# Altium PCB PCB1.PcbDoc
Units mil, origin at the board's own origin, x right, y up, seen from the top; angles counter-clockwise.
Board outline 1075 x 500 mil, 4 copper layers (Top Layer, GND, VCC, Bottom Layer), stack 23.756 mil thick; 13 components, 8 nets, 41 pads, 7 vias.
Unrouted connection lines stored in the file: 3.
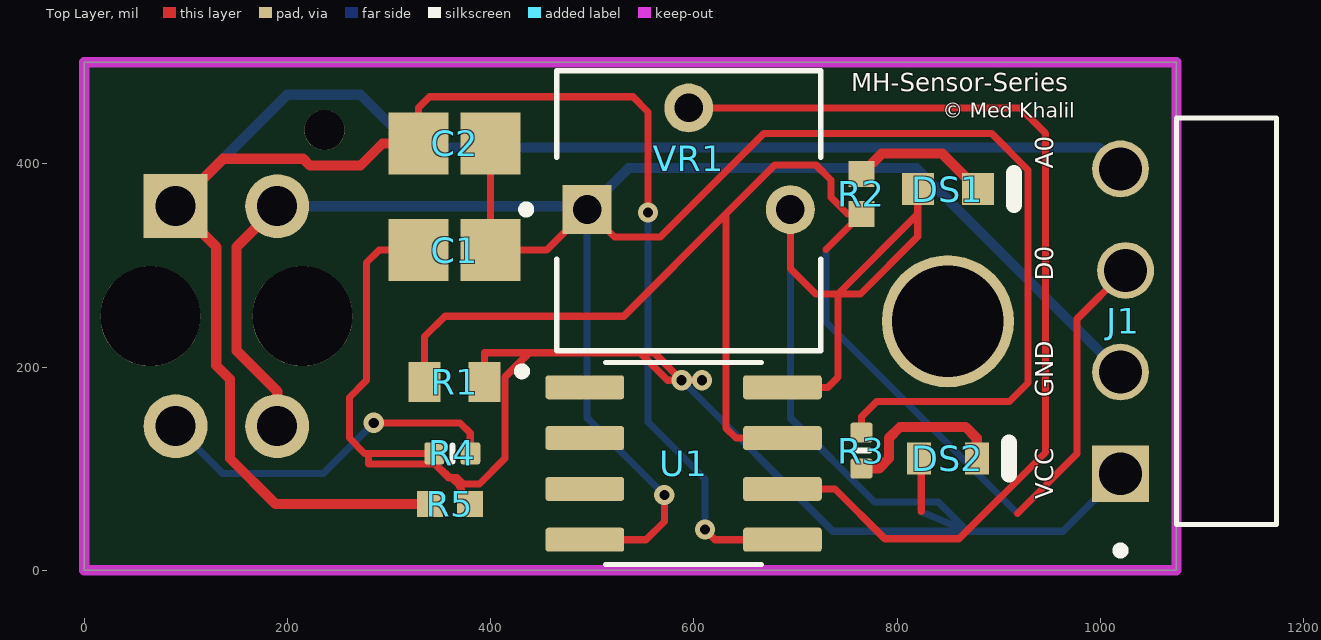
[diagram p0: Top Layer view]
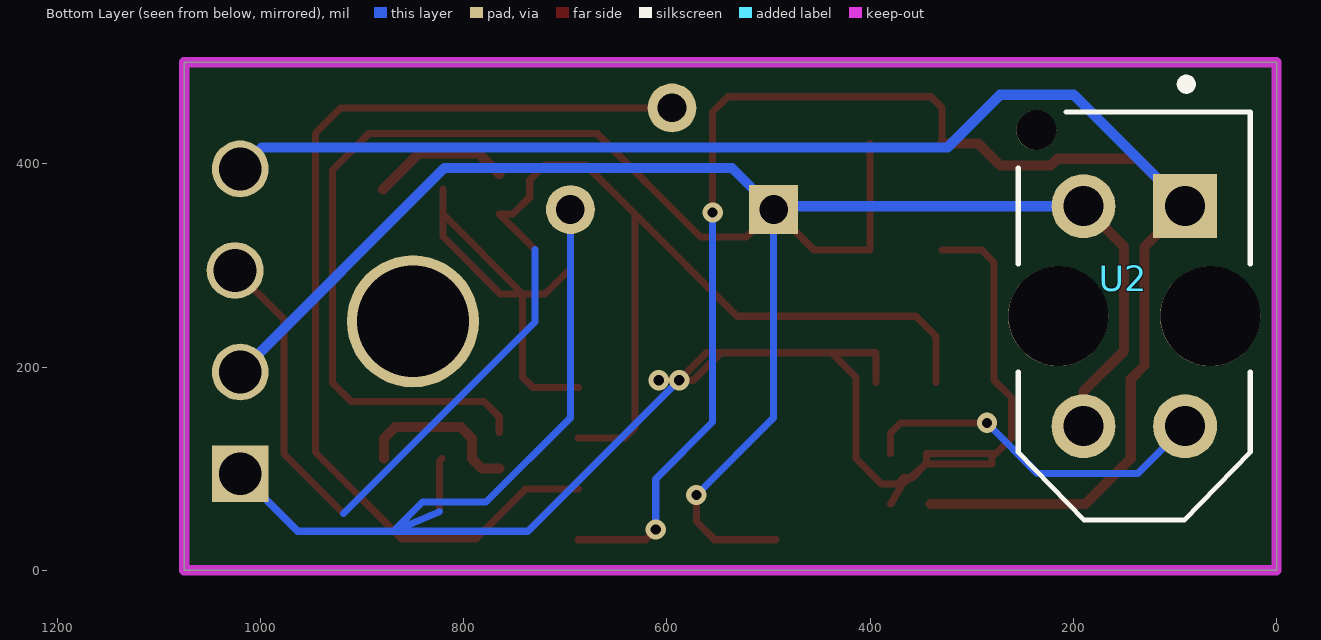
[diagram p1: Bottom Layer view, seen from below]
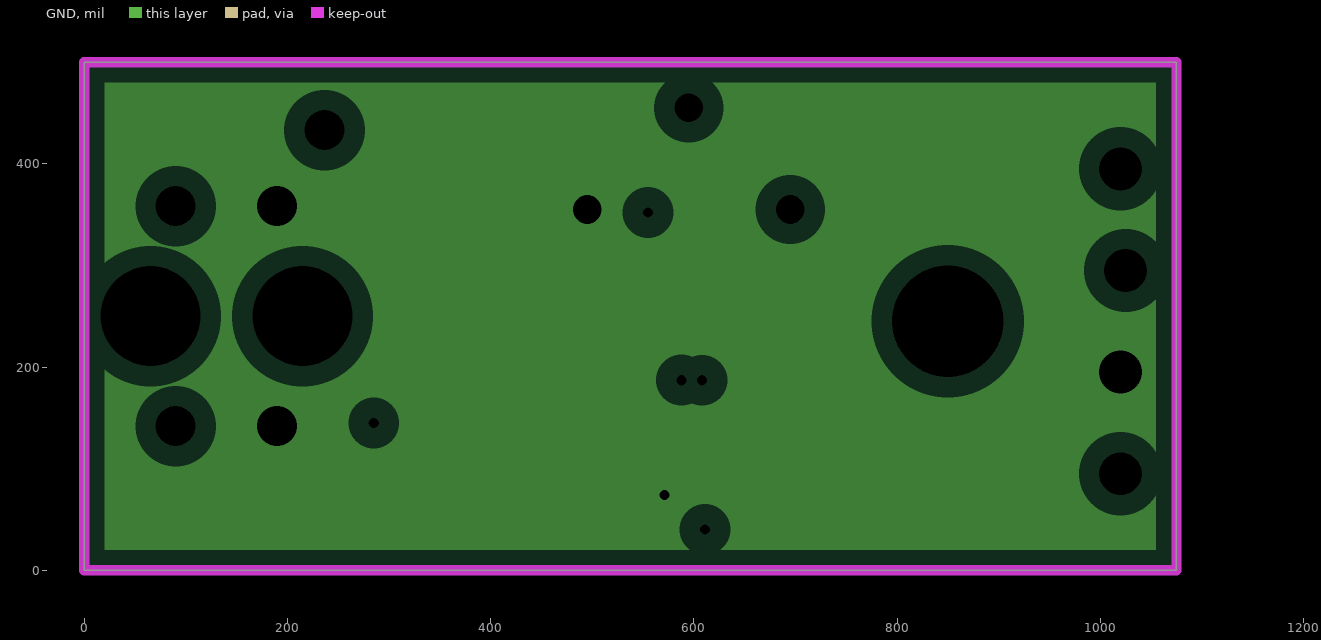
[diagram p2: GND, clearances drawn from the general rule]
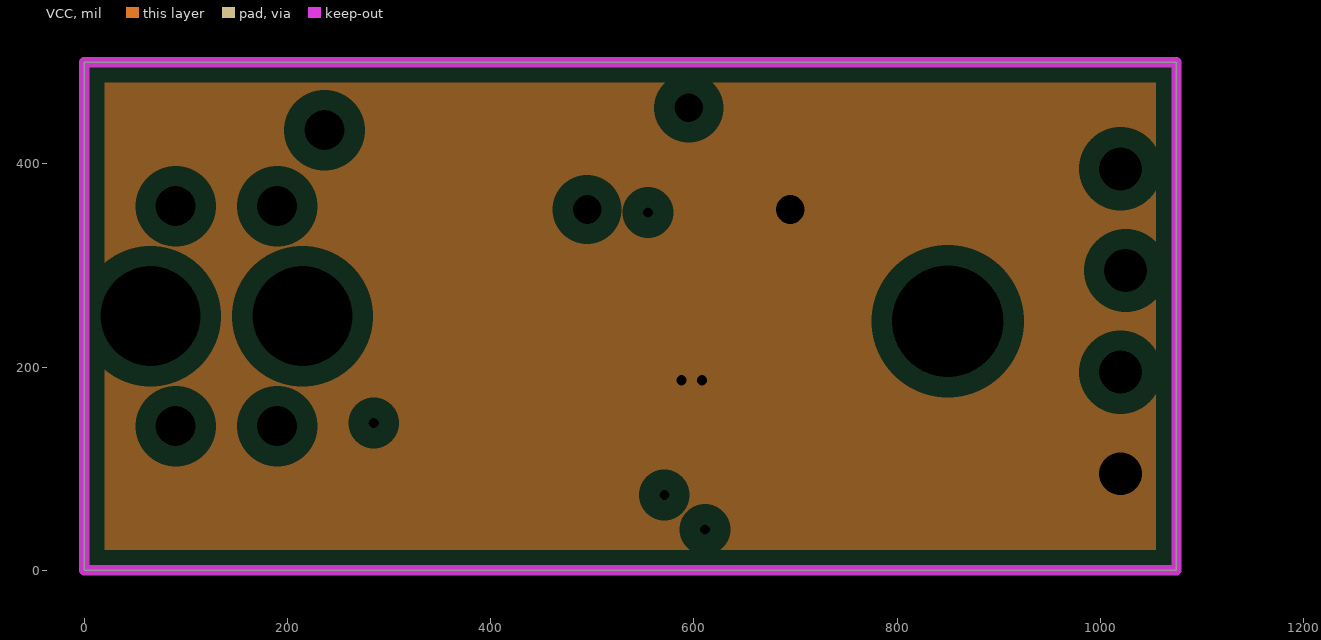
[diagram p3: VCC, clearances drawn from the general rule]
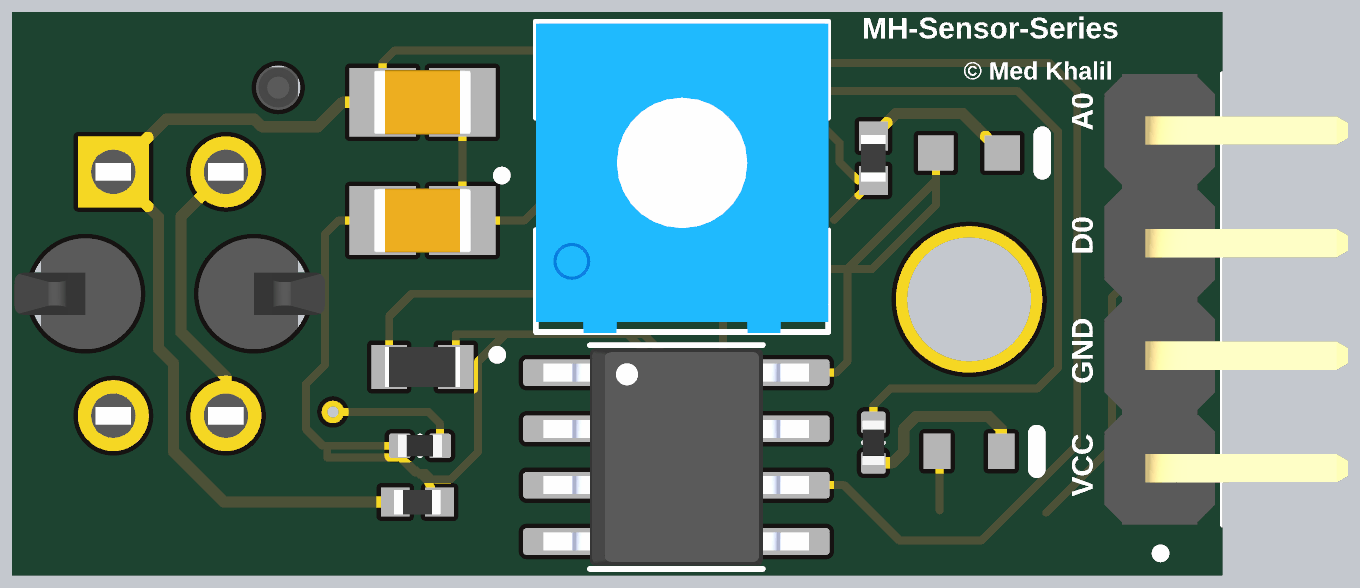
[diagram p4: 3D render of the assembled board from above, using the file's embedded part models]

## Layer stack, top to bottom
Top Solder: solder mask 0.4, Solder Resist, Dk 3.5
Top Layer: signal copper 1.4
Dielectric 2: prepreg 2.8, PP-006, Dk 4.1
GND: plane copper 1.378, net GND
Dielectric 1: dielectric 12.6, FR-4, Dk 4.8
VCC: plane copper 1.378, net VCC
Dielectric 3: prepreg 2.8, PP-006, Dk 4.1
Bottom Layer: signal copper 1.4
Bottom Solder: solder mask 0.4, Solder Resist, Dk 3.5

## Board outline
0,0 0,500 1075,500 1075,0

## Design rules (kind name [scope] priority, off if disabled: settings)
Clearance [All] p1: gap=10 ignorepadtopadclearanceinfootprint=FALSE
PlaneClearance [All] p1: clearance=20
PlaneConnect [All] p1: planeconnectstyle=Relief reliefexpansion=20 reliefentries=4 reliefconductorwidth=10 reliefairgap=10
PolygonConnect [All] p1: connectstyle=Relief reliefconductorwidth=10 reliefentries=4 polygonreliefangle="90 Angle" airgapwidth=10
RoutingVias [All] p1: holewidth=10 width=20 viastyle="Through Hole" minholewidth=10 minwidth=20 maxholewidth=10 maxwidth=20
SolderMaskExpansion [All] p1: expansion=4 istentingtop=FALSE
SupplyNets "Schematic Supply Nets_1" [InNet('VCC')] p1: voltage=0.000
SupplyNets "Schematic Supply Nets" [InNet('GND')] p2: voltage=0.000
Width [All] p1: maxlimit=7 minlimit=7 preferedwidth=7 minimp=50.000000 maximp=50.000000 favimp=50.000000
28 further rules are at their usual default settings.

## Components (designator, comment, footprint, x,y, rotation, side; value= is the part's Value field where it differs from the comment)
C1 "Capacitor 1 uF +/- 10% 25 V 0805" CAPC2013X145X50ML20T25 364.57,315 r0 top value=1µF
C2 "Capacitor 1 uF +/- 10% 25 V 0805" CAPC2013X145X50ML20T25 364.57,420 r0 top value=1µF
DS1 "LTST-C190GKT" LTST-C190GKT_V 850,375 r0 top
DS2 "TLMS1100-GS08" VISH-TLMX1100_V 850,110 r0 top
J1 "THS-04-R-RAF" VALCON_THS-04-R-RAF 1020,245 r270 top
R1 "Resistor 10k +/-1% 0603 100 mW" RESC1608X55X25ML10T15 364.53,185 r0 top value=10k
R2 "Resistor 1k +/-1% 0402 100 mW" RESC1005X40X25ML05T05 765,370.31 r90 top value=1k
R3 "Resistor 1K +/-5 % 0402 63 mW" RESC0402(1005)_L 765,117.72 r90 top value=1k
R4 "Resistor 100R +/-1 % 0402 63 mW" RESC0402(1005)_L 362.28,115 r0 top value=100
R5 "Resistor 100k +/-1% 0402 63 mW" RESC1005X40X25ML05T05 360,65 r0 top value=100k
U1 "LM393D" SOIC127P599X175-8N 590,105 r0 top
U2 "TCRT5000L" XDCR_TCRT5000L 140,250 r270 bottom
VR1 "3362P-1-103LF" TRIM_3362P-1-103LF 595,355 r0 top

## Footprints (in the part's own frame and the unit in brackets; to place one, negate y for a bottom-side part, rotate by r counter-clockwise, add the part's x,y. Pads: shape width x height; smd on the part's side, far side on the other; paste and mask are expansions set on the pad)
CAPC2013X145X50ML20T25 [mm] "Chip Capacitor, 2-Leads, Body 2.2x1.45mm, IPC Low Density"
  rect 1.5x1.55 smd: 1(-0.9,0) 2(0.9,0)
  body extent -1.1,-0.72 1.1,0.73, height 1.45
LTST-C190GKT_V [mm] "SMD, 2-Leads, Body 1.6x0.8mm"
  rect 0.8x0.8 smd: 1(-0.75,0) 2(0.75,0)
  silkscreen extent 1.65,-0.4 1.65,0.4, body extent -0.8,-0.4 0.8,0.4, height 0.9
RESC0402(1005)_L [mm] "Chip Resistor, Body 1.0x0.5mm, IPC High Density"
  rrect25% 0.5x0.55 smd: 1(-0.45,0) 2(0.45,0)
  silkscreen extent 0,-0.2 0,0.2, body extent -0.5,-0.25 0.5,0.25, height 0.3
RESC1005X40X25ML05T05 [mm] "Chip Resistor, 2-Leads, Body 1.05x0.55mm, IPC Low Density"
  rect 0.65x0.65 smd: 1(-0.5,0) 2(0.5,0)
  body extent -0.53,-0.28 0.53,0.28, height 0.4
RESC1608X55X25ML10T15 [mm] "Chip Resistor, 2-Leads, Body 1.70x0.90mm, IPC Low Density"
  rect 0.8x1 smd: 1(-0.75,0) 2(0.75,0)
  body extent -0.85,-0.45 0.85,0.45, height 0.55
SOIC127P599X175-8N [mm]
  rrect25% 1.97x0.6 smd: 1(-2.47,1.905) 2(-2.47,0.635) 3(-2.47,-0.635) 4(-2.47,-1.905) 5(2.47,-1.905) 6(2.47,-0.635) 7(2.47,0.635) 8(2.47,1.905)
  silkscreen extent -4.14,-2.53 1.95,2.53, body extent -3,-2.45 3,2.45, height 1.75
TRIM_3362P-1-103LF [mil]
  rect 48.11x48.11 hole 28.11: 1(-100,0)
  round 48.11 hole 28.11: 2(0,100) 3(100,0)
  silkscreen extent -164,-139 130,137, body extent -130,-140 130,135, height 170
VALCON_THS-04-R-RAF [mm]
  rect 1.42x1.42 hole 1.07: 01(3.81,0)
  round 1.42 hole 1.07: 02(1.27,0) 03(-1.27,0.127) 04(-3.81,0)
  silkscreen extent -5.08,-0.1 5.83,3.9, body extent -5.08,-1.27 5.08,4.23, height 4.23
VISH-TLMX1100_V [mm] "SMD, 2-Leads, Body 1.6x0.8mm"
  rect 0.6x0.8 smd: 1(-0.725,0) 2(0.725,0)
  silkscreen extent 1.53,-0.4 1.53,0.4, body extent -0.8,-0.4 0.8,0.4, height 0.65
XDCR_TCRT5000L [mm]
  rect 1.6x1.6 hole 1: 1(-2.75,1.27)
  round 1.6 hole 1: 2(-2.75,-1.27) 3(2.75,-1.27) 4(2.75,1.27)
  round 1 hole 1 unplated: ""(-4.65,-2.45)
  round 2.5 hole 2.5 unplated: ""(0,-1.9) ""(0,1.9)
  silkscreen extent -5.92,-2.9 5.1,2.9, body extent -5.1,-3.5 5.1,3.5, height 6.71

## Part data
C1 C2: library part CMP-001-00010-6, "Chip Capacitor, 1 uF, +/-10%, 25 V, 0805 (2012 Metric)", Capacitor Type=Ceramic, Case/Package=0805, Max Operating Temperature=125°C, Min Operating Temperature=-55°C, Tolerance=10%, Voltage Rating=25V, Mounting Technology=SM, Pins=2, RoHS Compliant=True
DS1: library part CMP-007-00022-2, "LED Uni-Color Green, 100 mW, 30 mA, -55 to 85 degC, 2-Pin SMD, RoHS, Tape and Reel", Case/Package=0603, Colour=Green, Forward Current=20mA, Forward Voltage=2.1V, Manufacturer=Lite-On, Max Operating Temperature=85°C, Min Operating Temperature=-55°C, Package Description="2-Pin Surface Mount Device, Body 1.6 x 0.8 mm", Package Quantity=3000, Package Reference=C190GKT, Power=100mW, Datasheet URL=http://datasheet.octopart.com/LTST-C190GKT-Lite-On-datasheet-158530.pdf, Datasheet Version=Dec-06, Illumination Colour=Green, Lens Style=Clear, Luminous Intensity=6mcd, Manufacturer URL=http://www.us.liteon.com/, Mounting Technology=SM, Nominal Vf=2.1V, Packaging=TapeandReel, Pins=2, RoHS Compliant=True, Viewing Angle=130degrees
DS2: library part CMP-007-00030-2, "Red Led, 20mA, 2.1 V, -40 to 100 degC, 2-Pin SMD (0603), RoHS, Tape and Reel", Case/Package=0603, Colour=Red, Forward Current=20mA, Forward Voltage=2.1V, Manufacturer="Vishay Semiconductor", Max Operating Temperature=100°C, Min Operating Temperature=-40°C, Package Description="2-Pin Surface Mount Device, Body 1.6 x 0.8 mm", Package Quantity=3000, Package Reference=TLMX1100, Power=90mW, Datasheet URL=http://www.vishay.com/docs/83173/tlmb1100.pdf, Datasheet Version="Rev. 2.7, 03/2016", Illumination Colour=Red, Lens Style=Clear, Luminous Intensity=63mcd, Manufacturer URL=http://www.vishay.com/, Mounting Technology=SM, Nominal Vf=2.1V, Packaging=TapeandReel, Pins=2, RoHS Compliant=True, Viewing Angle=160degrees
J1: Package=None, Availability=Unavailable, MP=THS-04-R-RAF, Price=None
R1: library part CMP-009-00017-5, "Chip Resistor, 10 KOhm, +/- 1%, 01 W, -55 to 155 degC, 0603 (1608 Metric)", Case/Package=0603, Max Operating Temperature=155°C, Min Operating Temperature=-55°C, Power=100mW, Tolerance=1%, Voltage Rating=50V, Mounting Technology=SM, Pins=2, RoHS Compliant=True
R2: library part CMP-009-00009-5, "Chip Resistor, 1 KOhm, +/- 1%, 0.1 W, -55 to 155 degC, 0402 (1005 Metric)", Case/Package=0402, Max Operating Temperature=155°C, Min Operating Temperature=-55°C, Power=100mW, Tolerance=1%, Voltage Rating=50V, Mounting Technology=SM, Pins=2, RoHS Compliant=True
R3: library part CMP-009-00157-3, "Chip Resistor, 1 kOhms, +/-5 %, 63 mW, -55 to 155 degC, 0402", Case/Package=0402, Max Operating Temperature=155°C, Min Operating Temperature=-55°C, Power=63mW, Tolerance=5%, Pins=2
R4: library part CMP-009-00167-3, "Chip Resistor, 100 Ohms, +/-1 %, 63 mW, -55 to 155 degC, 0402", Case/Package=0402, Max Operating Temperature=155°C, Min Operating Temperature=-55°C, Power=63mW, Tolerance=1%, Pins=2
R5: library part CMP-009-00021-5, "Chip Resistor, 100 KOhm, +/- 1%, 0.063 W, -55 to 155 degC, 0402 (1005 Metric)", Case/Package=0402, Max Operating Temperature=155°C, Min Operating Temperature=-55°C, Power=63mW, Tolerance=1%, Voltage Rating=50V, Mounting Technology=SM, Pins=2, RoHS Compliant=True
U1: "Dual differential comparator, commercial grade", Package="SOIC-8 Texas Instruments", Availability="In Stock", Check_prices=https://www.snapeda.com/parts/LM393D/Texas+Instruments/view-part/?ref=eda, MF="Texas Instruments", MP=LM393D, Price=None, Purchase-URL=https://pricing.snapeda.com/search/part/LM393D/?ref=eda, SnapEDA_Link=https://www.snapeda.com/parts/LM393D/Texas+Instruments/view-part/?ref=snap
U2: "Reflective Optical Sensor 0.591 _15mm_ PCB Mount", Package="PCB Mount Vishay Semiconductor", Availability=Unavailable, MF=Vishay, MP=TCRT5000L, Price=None, SnapEDA_Link=https://www.snapeda.com/parts/TCRT5000L/Vishay%20Semiconductor%20Opto%20Division/view-part/229608/?ref=snap
VR1: "10 kOhms 0.5W, 1/2W PC Pins Through Hole Trimmer Potentiometer Cermet 1 Turn Top Adjustment", Package="3116 Bourns", Check_prices=https://www.snapeda.com/parts/3362P-1-103LF/Bourns/view-part/13764/?ref=eda, Digi-Key_Part_Number=3362P-103LF-ND, MF=Bourns, MP=3362P-1-103LF, Purchase-URL=https://pricing.snapeda.com/search/part/3362P-1-103LF/?ref=eda, SnapEDA_Link=https://www.snapeda.com/parts/3362P-1-103LF/Bourns/view-part/13764/?ref=snap

## Free pads (board coordinates)
  round 130 hole 110: 13(850,245)

## Via types
v1: diameter 20, hole 10, Top Layer to Bottom Layer, 7 vias

## Nets (pads, with @x,y where several pads share a name; then routed paths per layer and width w, separated by ;. In a path a pad name is that pad's centre, name@x,y a point inside that pad or via, vN(x,y) a via of type N, cw(c..) or ccw(c..) an arc to the next point about the centre after c; other vN are vias at no path point)
A0: C2.1 J1.04 R5.1 U1.5 U2.1 | length 2548.1
  Top Layer w7: C2.1 329.13,455.13 340,466 540,466 555,451 v1(555,352) ; v1(611,40) 621,30 U1.5
  Top Layer w10: C2.1 293.62,420 272,398.38 222.09,398.38 215.47,405 136.73,405 U2.1 130,318.27 130,201.5 143.5,188 143.5,110 188.5,65 R5.1
  Bottom Layer w7: v1(555,352) 555,145.79 611,89.79 v1(611,40)
  Bottom Layer w10: U2.1 199.73,468 272,468 324.06,415.94 999.06,415.94 J1.04
D0: J1.03 R1.1 R2.1 U1.7 | length 1516.3
  Top Layer w7: R1.1 335,230 355,250 531,250 631.5,350.5 ; U1.7 641.5,130 631.5,140 631.5,350.5 ; 730,315.63 R2.1 751.37,350.63 735,367 735,384 720,399 680,399 631.5,350.5 ; 918.44,55.7 977,114.26 977,247 J1.03
  Bottom Layer w7: 730,315.63 730,244.14 918.44,55.7
GND: C1.2 C2.2 J1.02 R3.2 U1.4 U2.2 U2.3 VR1.1 | length 2727.4
  Top Layer w7: C2.2 C1.2 455,315 VR1.1 522,328 567,328 669,430 893,430 929,394 929,184.32 910.68,166 780,166 765,151 R3.2 ; U1.4 553,30 571,48 v1(571,74)
  Top Layer w10: U2.3 190,176 150,216 150,318.27 U2.2
  Bottom Layer w7: VR1.1 495,150 v1(571,74)
  Bottom Layer w10: U2.2 491.73,358.27 VR1.1 535.94,395.94 819.06,395.94 J1.02
NetDS1_2: DS1.2 R2.2 | length 137.3
  Top Layer w10: R2.2 785,410 844.53,410 DS1.2
NetDS2_2: DS2.2 R3.1 | length 166.8
  Top Layer w10: R3.1 782,100 792,110 792,130 803,141 867.54,141 878.54,130 DS2.2
NetR4_2: R4.2 U2.4 | length 354.2
  Top Layer w7: v1(285,145) 370,145 380,135 R4.2
  Bottom Layer w7: U2.4 136.73,95 235,95 v1(285,145)
POT: U1.6 VR1.2 | length 989.6
  Top Layer w7: VR1.2 921,455 946,430 946,116 861,31 788,31 739,80 U1.6
VCC: C1.1 DS1.1 DS2.1 J1.01 R1.2 R4.1 R5.2 U1.8 VR1.3 | length 2571.9
  Top Layer w7: C1.1 290,315 278,303 278,187 261,170 261,130 276,115 280,115 ; R5.2 368,85 360.87,91 ; R1.2 394.06,214 438,214 ; v1(587.93,187.21) 561.14,214 561,214 ; v1(608,187) v1(588,187) ; U1.8 732,180 742,190 742,272 ; VR1.3 695,297 720,272 742,272 ; DS1.1 820.47,350.47 ; DS2.1 823.84,107.62 823.84,57.6 ; 280,115 R4.1 344.57,105 346.37,103.2 ; 280,115 280,104.71 344.57,104.71 346.37,103.2 ; 346.37,103.2 360.87,91 ; 346.37,103.2 358.57,91 360.87,91 ; 360.87,91 367,91 373,85 389,85 414,110 414,190 438,214 ; 438,214 547,214 ; 547,214 561,214 ; 547,214 574,187 v1(588,187) ; 561,214 v1(588,187) ; 742,272 764,272 820.47,328.47 820.47,350.47 ; 742,272 820.47,350.47
  Bottom Layer w7: v1(587.93,187.21) 736.76,38.38 869.26,38.38 ; VR1.3 695,150 778,67 840.64,67 869.26,38.38 ; 823.84,57.6 869.26,38.38 ; J1.01 963.38,38.38 869.26,38.38
pads on no net: U1.1 U1.2 U1.3 U2.

## Polygon pours and split planes (outlines as drawn)
GND on GND (split plane): 1054.9,20.1 20.1,20.1 20.1,479.9 1054.9,479.9
VCC on VCC (split plane): 1054.9,20.1 20.1,20.1 20.1,479.9 1054.9,479.9

## Keep-outs
Keep-Out Layer:
  the board outline again, w10

## Silkscreen, mask and mechanical layers (free items; w line width, h text height)
Top Overlay:
  text "MH-Sensor-Series" at 755,465.47 h30
  text "© Med Khalil" at 845,440.39 h25
  text "A0" at 959.64,395 h30 r90
  text "D0" at 959.64,285 h30 r90
  text "GND" at 959.64,170 h30 r90
  text "VCC" at 959.67,70 h30 r90